# Altium PCB MotherBoard.PcbDoc
Units mil, origin at the board's own origin, x right, y up, seen from the top; angles counter-clockwise.
Board outline 6000 x 4000 mil, 2 copper layers (Top Layer, Bottom Layer); 88 components, 72 nets, 279 pads, 0 vias.
Unrouted connection lines stored in the file: 183.
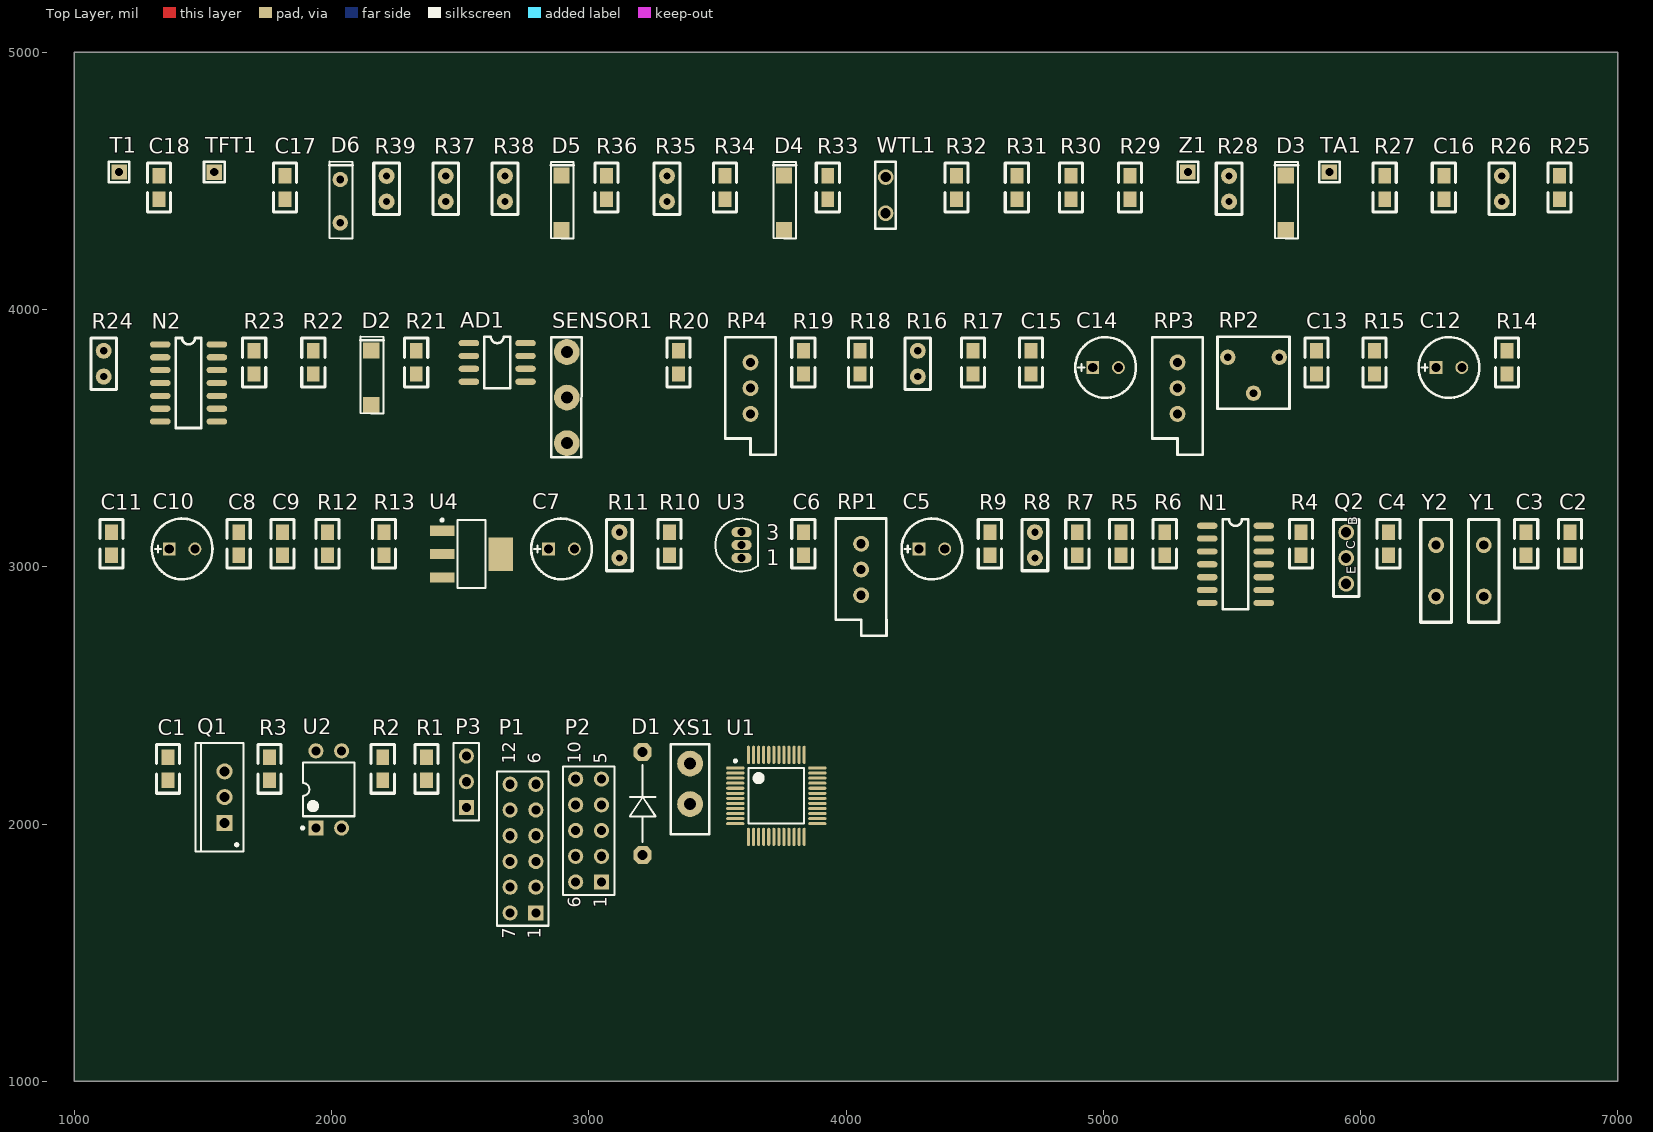
[diagram p0: Top Layer view]
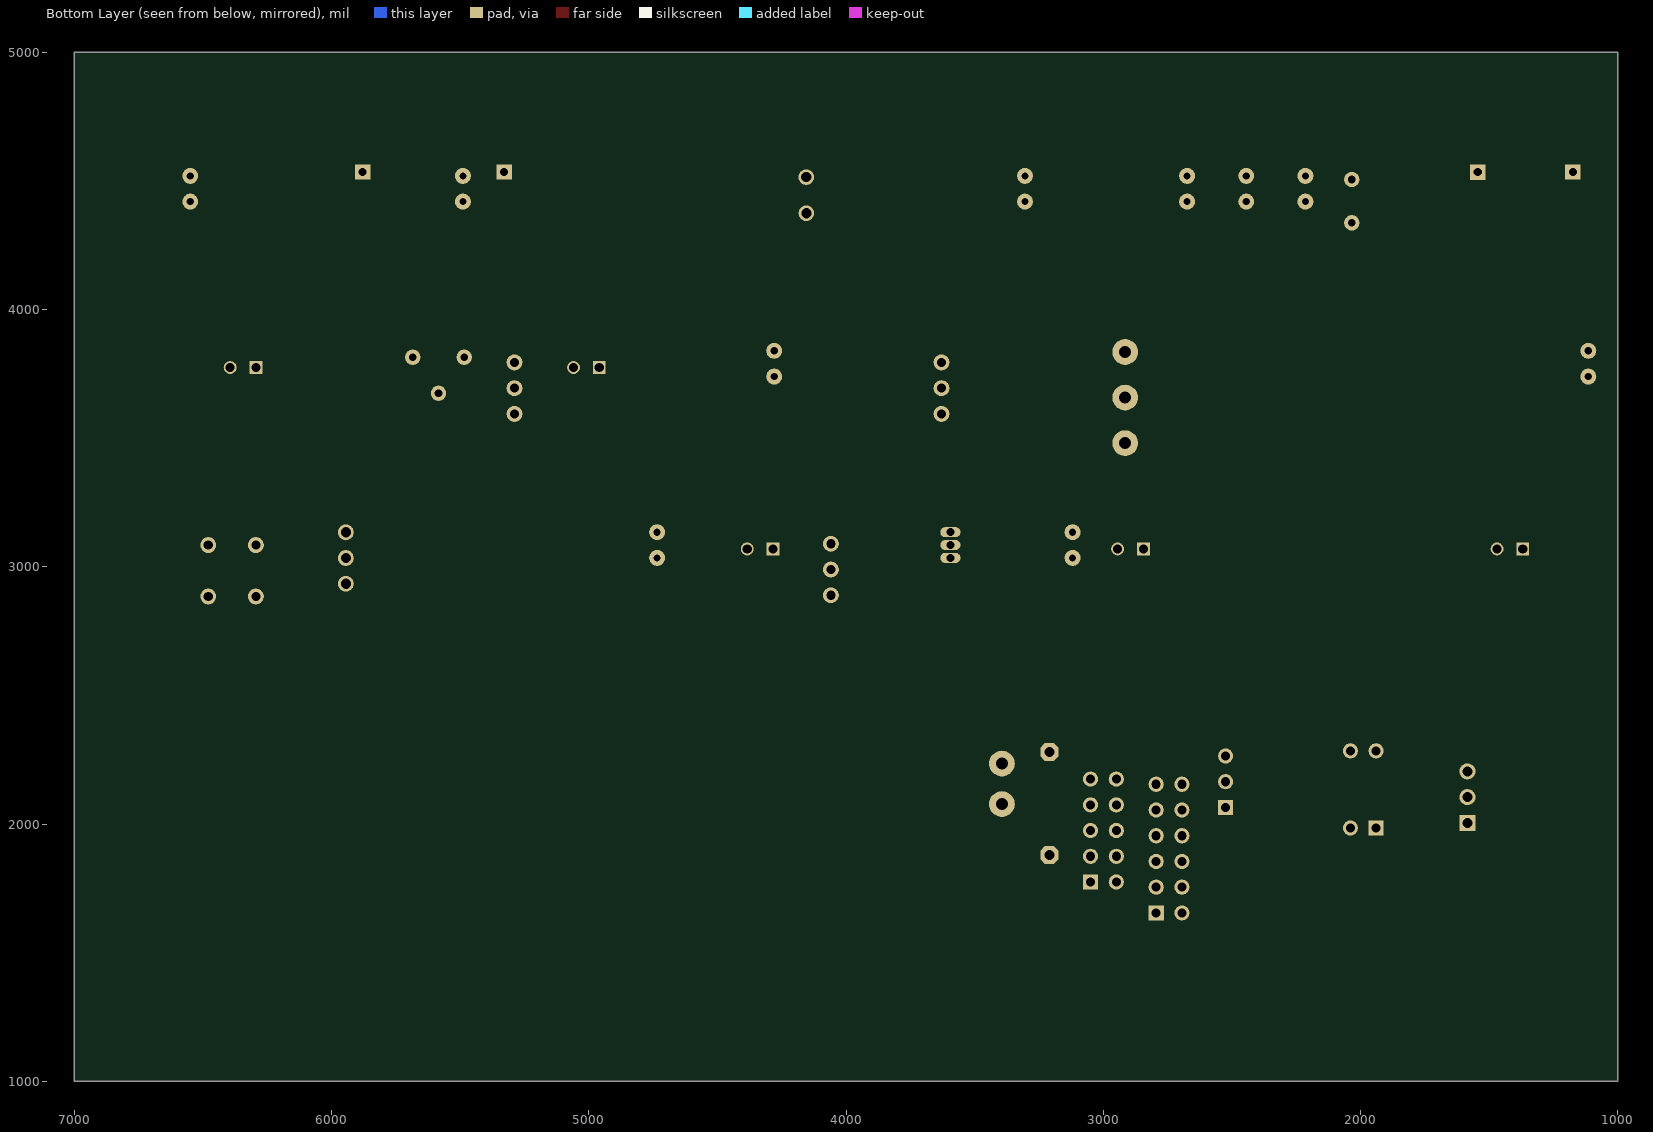
[diagram p1: Bottom Layer view, seen from below]

## Layer stack, top to bottom
Top Solder: solder mask 0.4, Solder Resist, Dk 3.5
Top Layer: signal copper 1.4
Dielectric 1: dielectric 12.6, FR-4, Dk 4.8
Bottom Layer: signal copper 1.4
Bottom Solder: solder mask 0.4, Solder Resist, Dk 3.5

## Board outline
1000,1000 7000,1000 7000,5000 1000,5000

## Design rules (kind name [scope] priority, off if disabled: settings)
Clearance [All] p1: gap=10 ignorepadtopadclearanceinfootprint=FALSE except(0: Arc-Hole Track-Hole SMDPad-Hole THPad-Hole Via-Hole Fill-Hole Poly-Hole Region-Hole Text-Hole)
PolygonConnect [All] p1: connectstyle=Relief reliefconductorwidth=10 reliefentries=4 polygonreliefangle="90 Angle" airgapwidth=10
RoutingVias [All] p1: holewidth=28 width=50 viastyle="Through Hole" minholewidth=28 minwidth=50 maxholewidth=28 maxwidth=50
SolderMaskExpansion [All] p1: expansion=4
Width [All] p1: maxlimit=10 minlimit=10 preferedwidth=10
30 further rules are at their usual default settings.

## Components (designator, comment, footprint, x,y, rotation, side; value= is the part's Value field where it differs from the comment)
AD1 "" SO-8 2644.17,3794.45 r0 top
C1 "10pF" R.4 1364.17,2169.45 r90 top value=104
C2 "10pF" R.4 6814.17,3044.45 r90 top value=10
C3 "10pF" R.4 6644.17,3044.45 r90 top value=104
C4 "10pF" R.4 6109.17,3044.45 r90 top value=10
C5 "4.7μ" CA-22U 4384.17,3069.45 r0 top
C6 "100nF" R.4 3834.17,3044.45 r90 top value=104
C7 "4.7μ" CA-22U 2944.17,3069.45 r0 top
C8 "0.47uF" R.4 1639.17,3044.45 r90 top
C9 "100nF" R.4 1809.17,3044.45 r90 top value=104
C10 "1μ" CA-22U 1469.17,3069.45 r0 top
C11 "10nF" R.4 1144.17,3044.45 r90 top value=104
C12 "1μ" CA-22U 6394.17,3774.45 r0 top
C13 "10nF" R.4 5829.17,3749.45 r90 top value=104
C14 "22uF" CA-22U 5059.17,3774.45 r0 top
C15 "0.1uF" R.4 4719.17,3749.45 r90 top
C16 "0.01uF" R.4 6324.17,4429.45 r90 top
C17 "0.01uF" R.4 1819.17,4429.45 r90 top
C18 "0.1uF" R.4 1329.17,4429.45 r90 top
D1 "2CK73C" V.4 3209.17,1879.45 r0 top
D2 "2CK73C" DIODE 2154.17,3734.45 r90 top
D3 "2CK73C" DIODE 5709.17,4414.45 r90 top
D4 "2CK73C" DIODE 3759.17,4414.45 r90 top
D5 "2CK73C" DIODE 2894.17,4414.45 r90 top
D6 "2DW234" zena 2034.17,4414.45 r90 top
N1 "LM124" SO-14 5514.17,3009.45 r0 top
N2 "LM124" SO-14 1444.17,3714.45 r0 top
P1 "" HDR2X6_CEN 2794.17,1654.45 r90 top
P2 "Header 5X2A" HDR2X5_CEN 3049.17,1774.45 r90 top
P3 "Header 3" HDR1X3 2524.17,2064.45 r90 top
Q1 "MOSFET-N" TO-220AB 1584.17,2104.45 r90 top
Q2 "MC9013" BJT 5944.17,3134.45 r90 top
R1 "10K" R.4 2369.17,2169.45 r90 top
R2 "10K" R.4 2199.17,2169.45 r90 top
R3 "1K" R.4 1759.17,2169.45 r90 top
R4 "10K" R.4 5769.17,3044.45 r90 top
R5 "2K" R.4 5069.17,3044.45 r90 top
R6 "100" R.4 5239.17,3044.45 r90 top
R7 "10K" R.4 4899.17,3044.45 r90 top
R8 "100" RAD0.1 4734.17,3034.45 r90 top
R9 "680" R.4 4559.17,3044.45 r90 top
R10 "20K" R.4 3314.17,3044.45 r90 top
R11 "500" RAD0.1 3119.17,3034.45 r90 top
R12 "12K" R.4 1984.17,3044.45 r90 top
R13 "680" R.4 2204.17,3044.45 r90 top
R14 "91K" R.4 6569.17,3749.45 r90 top
R15 "20K" R.4 6054.17,3749.45 r90 top
R16 "10K" RAD0.1 4279.17,3739.45 r90 top
R17 "10K" R.4 4494.17,3749.45 r90 top
R18 "300" R.4 4054.17,3749.45 r90 top
R19 "2K" R.4 3834.17,3749.45 r90 top
R20 "600" R.4 3349.17,3749.45 r90 top
R21 "10K" R.4 2329.17,3749.45 r90 top
R22 "300" R.4 1929.17,3749.45 r90 top
R23 "300" R.4 1699.17,3749.45 r90 top
R24 "10K" RAD0.1 1114.17,3739.45 r90 top
R25 "10K" R.4 6774.17,4429.45 r90 top
R26 "680" RAD0.1 6549.17,4419.45 r90 top
R27 "10K" R.4 6094.17,4429.45 r90 top
R28 "680" RAD0.1 5489.17,4419.45 r90 top
R29 "10K" R.4 5104.17,4429.45 r90 top
R30 "300" R.4 4874.17,4429.45 r90 top
R31 "0" R.4 4664.17,4429.45 r90 top
R32 "600" R.4 4429.17,4429.45 r90 top
R33 "100K" R.4 3929.17,4429.45 r90 top
R34 "10K" R.4 3529.17,4429.45 r90 top
R35 "680" RAD0.1 3304.17,4419.45 r90 top
R36 "10K" R.4 3069.17,4429.45 r90 top
R37 "620" RAD0.1 2444.17,4419.45 r90 top
R38 "680" RAD0.1 2674.17,4419.45 r90 top
R39 "680" RAD0.1 2214.17,4419.45 r90 top
RP1 "10K" VR5132 4059.17,3089.45 r90 top
RP2 "200K" "changable res" 5584.17,3754.45 r0 top
RP3 "500" VR5132 5289.17,3794.45 r90 top
RP4 "100" VR5132 3629.17,3794.45 r90 top
SENSOR1 "CZ-3" SENSOR 2914.17,3834.45 r0 top
T1 "CON1" "PAD - RECT" 1174.17,4534.45 r0 top
TA1 "CON1" "PAD - RECT" 5879.17,4534.45 r0 top
TFT1 "CON1" "PAD - RECT" 1544.17,4534.45 r90 top
U1 "STM32F373CCT6" STM-LQFP48_N 3729.17,2109.45 r0 top
U2 "Optoisolator1" DIP-4 1989.17,2134.45 r90 top
U3 "TL431ACLP" LP03 3594.17,3084.45 r0 top
U4 "AMS111733" SOT223_N 2544.17,3049.45 r0 top
WTL1 "CON1" ADJ 4154.17,4514.45 r0 top
XS1 "CZ-2" VALVE 3394.17,2234.45 r0 top
Y1 "8M" XTAL1 6479.17,2884.45 r90 top
Y2 "32.768K" XTAL1 6294.17,2884.45 r90 top
Z1 "CON1" "PAD - RECT" 5329.17,4534.45 r0 top

## Footprints (in the part's own frame and the unit in brackets; to place one, negate y for a bottom-side part, rotate by r counter-clockwise, add the part's x,y. Pads: shape width x height; smd on the part's side, far side on the other; paste and mask are expansions set on the pad)
ADJ [mm]
  round 1.54 hole 1: 1(0,-3.556) 2(0.01,0.011)
  silkscreen extent -1.02,-5.08 1.02,1.52
BJT [mil]
  round 62 hole 39.37: B(-0.49,-0.21) C(-100.49,-0.21) E(-200.49,-0.21)
  silkscreen extent -250,-50 50,50
CA-22U [mm]
  rect 1.27x1.27 hole 0.9: 1(-2.543,0)
  round 1.27 hole 0.9: 2(-0.003,0)
  silkscreen extent -4.27,-3 1.73,3
"changable res" [mil]
  round 60 hole 30: 1(100,60) 2(-100,60) 3(0,-80)
  silkscreen extent -140,-140 140,140
DIODE [mm]
  rect 1.6x1.6 smd: A(-2.7,0) K(2.7,0)
  silkscreen extent -3.51,-1.22 4.06,1.07
DIP-4 [mm] "DIP; 4 Leads; Row Spacing 7.62 mm; Pitch 2.54 mm"
  rect 1.5x1.5 hole 0.9: 1(-3.81,1.27)
  round 1.5 hole 0.9: 2(-3.81,-1.27) 3(3.81,-1.27) 4(3.81,1.27)
  silkscreen extent -3.93,-2.55 2.65,2.69, body extent -3.15,-2.5 3.15,2.5, height 5.6
HDR1X3 [mm] "Connector; Header; 3 Position"
  rect 1.5x1.5 hole 0.9: 1(0,0)
  round 1.5 hole 0.9: 2(2.54,0) 3(5.08,0)
  silkscreen extent -1.27,-1.27 6.35,1.27
HDR2X5_CEN [mm] "Connector; Header; 5x2 Position"
  rect 1.5x1.5 hole 0.9: 1(0,0)
  round 1.5 hole 0.9: 2(2.54,0) 3(5.08,0) 4(7.62,0) 5(10.16,0) 6(0,2.54) 7(2.54,2.54) 8(5.08,2.54) 9(7.62,2.54) 10(10.16,2.54)
  silkscreen extent -1.27,-1.27 11.43,3.81
HDR2X6_CEN [mm] "Connector; Header; 6x2 Position"
  rect 1.5x1.5 hole 0.9: 1(0,0)
  round 1.5 hole 0.9: 2(2.54,0) 3(5.08,0) 4(7.62,0) 5(10.16,0) 6(12.7,0) 7(0,2.54) 8(2.54,2.54) 9(5.08,2.54) 10(7.62,2.54) 11(10.16,2.54) 12(12.7,2.54)
  silkscreen extent -1.27,-1.27 13.97,3.81
LP03 [mm] "TO, Flat Index; 3 In-Line, Axial Leads; Body Dia. 4.8mm; Leads 0.56 x 0.41 mm (max)"
  oval 2x1 hole 0.8: 1(0,-1.27) 2(0,0) 3(0,1.27)
  silkscreen extent -2.6,-2.6 1.6,2.6
"PAD - RECT" [mil]
  rect 60x60 hole 31.5: 1(-0.09,0.23)
  silkscreen extent -40,-40 40,40
R.4 [mil]
  rect 60x50 smd: 1(0.01,-0.01) 2(90.01,-0.01)
  silkscreen extent -50,-45 140,45
RAD0.1 [mil]
  round 62 hole 28: 1(0,-0.01) 2(100,-0.01)
  silkscreen extent -50,-50 150,50
SENSOR [mil]
  round 100 hole 47: 1(0.56,0.44) 2(0.56,-176.72) 3(0.56,-353.89)
  silkscreen extent -60,-409 58,58
SO-8 [mil]
  oval 80x24 smd: 1(-110,75) 2(-110,25) 3(-110,-25) 4(-110,-75) 5(110,-75) 6(110,-25) 7(110,25) 8(110,75)
  silkscreen extent -50,-100 50,100
SO-14 [mil]
  oval 80x24 smd: 1(-110,150) 2(-110,100) 3(-110,50) 4(-110,0) 5(-110,-50) 6(-110,-100) 7(-110,-150) 8(110,-150) 9(110,-100) 10(110,-50) 11(110,0) 12(110,50) 13(110,100) 14(110,150)
  silkscreen extent -50,-175 50,175
SOT223_N [mm] "SOT223, 4-Leads, Body 6.5x3.5mm, Pitch 2.3mm, Lead Span 7mm, IPC Medium Density"
  rect 2.4x1 smd: 1(-2.9,2.3) 2(-2.9,0) 3(-2.9,-2.3)
  rect 2.4x3.3 smd: 4(2.9,0)
  silkscreen extent -3.02,-3.35 1.4,3.47, body extent -1.85,-3.35 1.85,3.35, height 1.7
STM-LQFP48_N [mm] "QFP, 48-Leads, Body 7x7mm, Pitch 0.5mm, IPC Medium Density"
  oval 1.8x0.3 smd: 1(-4.05,2.75) 2(-4.05,2.25) 3(-4.05,1.75) 4(-4.05,1.25) 5(-4.05,0.75) 6(-4.05,0.25) 7(-4.05,-0.25) 8(-4.05,-0.75) 9(-4.05,-1.25) 10(-4.05,-1.75) 11(-4.05,-2.25) 12(-4.05,-2.75) 25(4.05,-2.75) 26(4.05,-2.25) 27(4.05,-1.75) 28(4.05,-1.25) 29(4.05,-0.75) 30(4.05,-0.25) 31(4.05,0.25) 32(4.05,0.75) 33(4.05,1.25) 34(4.05,1.75) 35(4.05,2.25) 36(4.05,2.75)
  oval 0.3x1.8 smd: 13(-2.75,-4.05) 14(-2.25,-4.05) 15(-1.75,-4.05) 16(-1.25,-4.05) 17(-0.75,-4.05) 18(-0.25,-4.05) 19(0.25,-4.05) 20(0.75,-4.05) 21(1.25,-4.05) 22(1.75,-4.05) 23(2.25,-4.05) 24(2.75,-4.05) 37(2.75,4.05) 38(2.25,4.05) 39(1.75,4.05) 40(1.25,4.05) 41(0.75,4.05) 42(0.25,4.05) 43(-0.25,4.05) 44(-0.75,4.05) 45(-1.25,4.05) 46(-1.75,4.05) 47(-2.25,4.05) 48(-2.75,4.05)
  silkscreen extent -4.17,-2.75 2.75,3.57, body extent -3.5,-3.5 3.5,3.5, height 1.6
TO-220AB [mm] "TO, Thru-Hole, Vertical, Heatsink Mounted; 3 In-Line Leads; Pitch 2.54 mm"
  rect 1.6x1.6 hole 1: 1(-2.54,0)
  round 1.6 hole 1: 2(0,0) 3(2.54,0)
  silkscreen extent -5.35,-1.85 5.35,2.85, body extent -5.4,-1.9 5.4,2.9, height 19.3
V.4 [mil]
  oct 70x70 hole 39: A(0.38,0.43) K(0.38,400.43)
  silkscreen extent -50,50 50,350
VALVE [mil]
  round 100 hole 47: 1(-0.24,0.54) 2(-0.24,-156.94)
  silkscreen extent -75,-275 75,76
VR5132 [mil]
  round 62 hole 35.43: 1(-0.13,0.33) 2(-200.13,0.33) 3(-100.13,0.33)
  silkscreen extent -358,-98 98,99
XTAL1 [mil]
  round 62 hole 35.43: 1(0,0) 2(200,0)
  silkscreen extent -100,-60 300,60
zena [mil]
  round 60 hole 30: A(-77.56,0.39) K(90.94,0.39)
  silkscreen extent -138,-48 160,42

## Part data
AD1: library part AD8221
C1 C3: library part Cap, "Capacitor", LatestRevisionDate=17-Jul-2002, LatestRevisionNote="Re-released for DXP Platform.", Published=8-Jun-2000, Publisher="Altium Limited"
C2 C4 C6 C9 C11 C13: library part CAP, "Capacitor", LatestRevisionDate=17-Jul-2002, LatestRevisionNote="Re-released for DXP Platform.", Published=8-Jun-2000, Publisher="Altium Limited"
C5 C7 C10 C12 C14: library part ELECTRO2
C8 C15 C16 C17 C18: library part CAP
D1 D2 D3 D4 D5: library part DIODE
D6: library part "DIODE SCHOTTKY"
N1: library part MFC7A.S01_LM124_56
N2: library part LM1241
P1: library part "Header 6X2A", "Header, 6-Pin, Dual row", LatestRevisionDate=17-Jul-2002, LatestRevisionNote="Re-released for DXP Platform.", Publisher="Altium Limited"
P2: "Header, 5-Pin, Dual row", LatestRevisionDate=17-Jul-2002, LatestRevisionNote="Re-released for DXP Platform.", Publisher="Altium Limited"
P3: "Header, 3-Pin", LatestRevisionDate=17-Jul-2002, LatestRevisionNote="Re-released for DXP Platform.", Publisher="Altium Limited"
Q1: "N-Channel MOSFET", LatestRevisionDate=17-Jul-2002, LatestRevisionNote="Re-released for DXP Platform.", PackageDescription="TO, Flat Index; 3 In-Line, Axial Leads; Body Dia. 4.6mm; Lead Dia. 0.5 mm (max)", PackageReference=E3, PackageVersion=1995/1996, Published=8-Jun-2000, Publisher="Altium Limited"
R1 R2 R3 R4 R5 R6 R7 R9 R10 R12 R13 R14 R15 R17 R18 R19 R20 R21 R22 R23 R25 R27 R29 R30 R31 R32 R33 R34 R36: library part RES_1
R8 R11 R16 R24 R26 R28 R35 R37 R38 R39: library part RES
RP1 RP3 RP4: library part POT2
RP2: library part POT2, "3362"
U1: "ARM Cortex-M4 32-bit MCU, 256 KB Flash, 32 KB Internal RAM, 36 I/Os, 48-pin LQFP, -40 to 85 degC, Tray", I/Os (High Current)=36, Operating Frequency(F) (Processor speed) (MHz)=72, Supplier Part Number 1=497-13251-ND, Supply Voltage(Vcc) min (V)=2, ComponentLink1Description="Manufacturer URL", ComponentLink1URL=http://www.st.com/web/en/home.html, ComponentLink2Description=Datasheet, ComponentLink2URL=http://www.st.com/st-web-ui/static/active/en/resource/technical/document/datasheet/DM00046749.pdf, ComponentLink3Description="Package Specification", ComponentLink3URL=http://www.st.com/st-web-ui/static/active/en/resource/technical/document/datasheet/DM00058181.pdf, Core="ARM Cortex-M4", DatasheetVersion="Rev. 3", FLASH Size (Prog) (kB)=256, Internal RAM Size (kB)=32, Mounting Technology="Surface Mount", PackageDescription="48-Pin Low Profile Quad Flat Package, 7 x 7 mm Body, 0.5 mm Pitch", PackageReference=LQFP48, PackageVersion="Rev. 6, 06/2013", Packing=Tray, PartNumber=STM32F373CCT6, Supplier 1=Digi-Key, Supplier 2=Farnell, Supplier 3=Newark, Supplier 4=Newark, Supplier 5=Mouser, Supplier Part Number 2=2215117, Supplier Part Number 3=46W2195, Supplier Part Number 4=48W6893, Supplier Part Number 5=511-STM32F373CCT6
U2: "4-Pin Phototransistor Optocoupler", DatasheetVersion=Nov-2003, LatestRevisionDate=04-Mar-2005, LatestRevisionNote="Sch pins 3 & 4 Swapped.", PackageReference=DIP-4, Published=24-Mar-1999, Publisher="Altium Limited"
U3: "Adjustable Precision Shunt Regulator", Code_JEDEC=TO-226-AA, ComponentLink1Description="Manufacturer Link", ComponentLink1URL=http://www.ti.com/, ComponentLink2Description=Datasheet, ComponentLink2URL=http://www-s.ti.com/sc/ds/tl431a.pdf, DatasheetVersion=Oct-2000, LatestRevisionDate=06-Jun-2005, LatestRevisionNote="Sch pins 1 & 3 swapped", PackageDescription="TO, Flat Index; 3 In-Line, Axial Leads; Body Dia. 4.8mm; Leads 0.56 x 0.41 mm (max)", PackageReference=LP03, PackageVersion=Nov-2001, Published=15-Apr-2002, Publisher="Altium Limited"
U4: library part TL431
WTL1: library part CON1_1
Y1 Y2: library part XTAL, "Crystal Oscillator", LatestRevisionDate=17-Jul-2002, LatestRevisionNote="Re-released for DXP Platform.", Published=8-Jun-2000, Publisher="Altium Limited"

## Nets (pads, with @x,y where several pads share a name; then routed paths per layer and width w, separated by ;. In a path a pad name is that pad's centre, name@x,y a point inside that pad or via, vN(x,y) a via of type N, cw(c..) or ccw(c..) an arc to the next point about the centre after c; other vN are vias at no path point)
485En: P2.7 U1.29
485RxD: P2.9 U1.31
485TxD: P2.8 U1.30
+3.3V: C5.1 C6.2 C7.1 C9.2 C10.1 C11.2 C12.1 C13.2 D2.K D4.K R2.2 R3.1 R7.2 U1.9 U1.17 U1.24 U1.48 U4.2
+3vREFSD: R6.2 R8.2 U1.25 U3.3
+5V: P1.5 R6.1 U4.3
+15: Q2.C
+15V: AD1.8 N1.4 N2.4 P1.3
-15V: AD1.5 N1.11 N2.11 P1.4 Q1.3 R9.2 R13.2 U2.3
Bak1: P1.6 U1.14
Bak2: P1.8 P1.12 U1.15
BOOT: P3.2 U1.44
CAN_Rx: P2.5 U1.45
CAN_Tx: P2.10 U1.46
DGND: C1.2 C2.1 C3.2 C4.1 C5.2 C6.1 C7.2 C9.1 C10.2 C11.1 C12.2 C13.1 P2.6 P3.1 R11.1 R31.2 U1.8 U1.23 U1.47 U3.2 U4.1
EZ: P1.2 WTL1.1
"FLOW  TEST": C15.2 N2.10 P1.7 R15.2 R22.2 TFT1.1
GND: C18.2 P1.11
NetAD1_1: AD1.1 R21.2
NetAD1_2: AD1.2 RP3.2
NetAD1_3: AD1.3 RP3.1 RP3.3
NetAD1_4: AD1.4 R25.2
NetAD1_6: AD1.6 N1.8 R29.2
NetAD1_7: AD1.7 R17.1 R23.1 TA1.1
NetC1_1: C1.1 U1.5 Y1.2
NetC2_2: C2.2 U1.3 Y2.2
NetC3_1: C3.1 U1.6 Y1.1
NetC4_2: C4.2 U1.4 Y2.1
NetC8_1: C8.1 N1.1 R5.2
NetC8_2: C8.2 N1.2 R14.2 R27.2 RP1.2
NetC14_1: C14.1 C15.1 N1.6 RP2.1
NetC14_2: C14.2 R19.2
NetC16_2: C16.2 N1.5 R23.2
NetD1_A: D1.A Q1.2 XS1.2
NetD2_A: D2.A D3.K N2.5 R26.1 R28.2
NetD4_A: D4.A D5.K N2.12 R35.1 R39.2
NetN1_3: N1.3 R4.1 RP1.1
NetN1_7: N1.7 R22.1
NetN1_9: N1.9 R29.1 R33.2 R34.2
NetN1_10: N1.10 R36.1
NetN2_1: N2.1 R18.2 R26.2
NetN2_2: N2.2 R18.1
NetN2_6: N2.6 R20.1
NetN2_8: N2.8 R30.2 R35.2
NetN2_9: N2.9 R30.1
NetN2_13: N2.13 R32.1
NetP3_3: P3.3 R2.1
NetQ1_1: Q1.1 R1.1 U2.4
NetQ2_B: Q2.B R5.1
NetQ2_E: Q2.E R14.1 R16.2 SENSOR1.3
NetR3_2: R3.2 U2.1
NetR7_1: R7.1 U1.7
NetR8_1: R8.1 R11.2 U3.1
NetR10_1: R10.1 R12.1 R17.2
NetR10_2: R10.2 RP1.3
NetR15_1: R15.1 RP2.2 RP2.3
NetR16_1: R16.1 RP4.1
NetR21_1: R21.1 SENSOR1.2
NetR24_1: R24.1 R27.1 R37.2 R38.2 SENSOR1.1
NetR24_2: R24.2 RP4.2
NetR25_1: R25.1 RP4.3 Z1.1
NetR33_1: R33.1 WTL1.2
PGND: D1.K P1.10 R1.2 XS1.1
PWM: U1.16 U2.2
SensorOut: N2.14 R32.2 U1.18
SetPoint: N2.7 R20.2 U1.19
SetPointIn: N2.3 P1.1
SGND: C16.1 C17.1 C17.2 C18.1 D3.A D5.A D6.A D6.K P1.9 R4.2 R9.1 R12.2 R13.1 R19.1 R28.1 R31.1 R34.1 R36.2 R37.1 R38.1 R39.1 T1.1
USART2_Rx: P2.1 U1.13
USART2_Tx: P2.2 U1.12
USB_DM: P2.3 U1.32
USB_DP: P2.4 U1.33
pads on no net: N1.12 N1.13 N1.14 U1.1 U1.2 U1.10 U1.11 U1.20 U1.21 U1.22 U1.26 U1.27 U1.28 U1.34 U1.35 U1.36 U1.37 U1.38 U1.39 U1.40 U1.41 U1.42 U1.43 U4.4

## Text inside footprints (layer, text, board x,y; h text height)
P1: Top Overlay "12" at 2714.17,2234.45 h50 r90; Top Overlay "6" at 2814.17,2234.45 h50 r90; Top Overlay "1" at 2814.17,1554.45 h50 r90; Top Overlay "7" at 2714.17,1554.45 h50 r90
P2: Top Overlay "1" at 3069.17,1674.45 h50 r90; Top Overlay "5" at 3069.17,2234.45 h50 r90; Top Overlay "10" at 2969.17,2234.45 h50 r90; Top Overlay "6" at 2969.17,1674.45 h50 r90
Q2: Top Overlay "E" at 5981.68,2970.98 h35.43 r90; Top Overlay "C" at 5980.1,3069.01 h35.43 r90; Top Overlay "B" at 5987.58,3160.74 h35.43 r90
U3: Top Overlay "1" at 3689.49,3006.54 h59.05; Top Overlay "3" at 3689.49,3102.83 h59.05